# Altium PCB lab1_kochurin_usb_rs485.PcbDoc
Units mm, origin at the board's own origin, x right, y up, seen from the top; angles counter-clockwise.
Board outline 37 x 27 mm, 4 copper layers (Top Layer, Signal Layer 1, Signal Layer 2, Bottom Layer), stack 1.522 mm thick; 19 components, 17 nets, 95 pads, 546 vias.
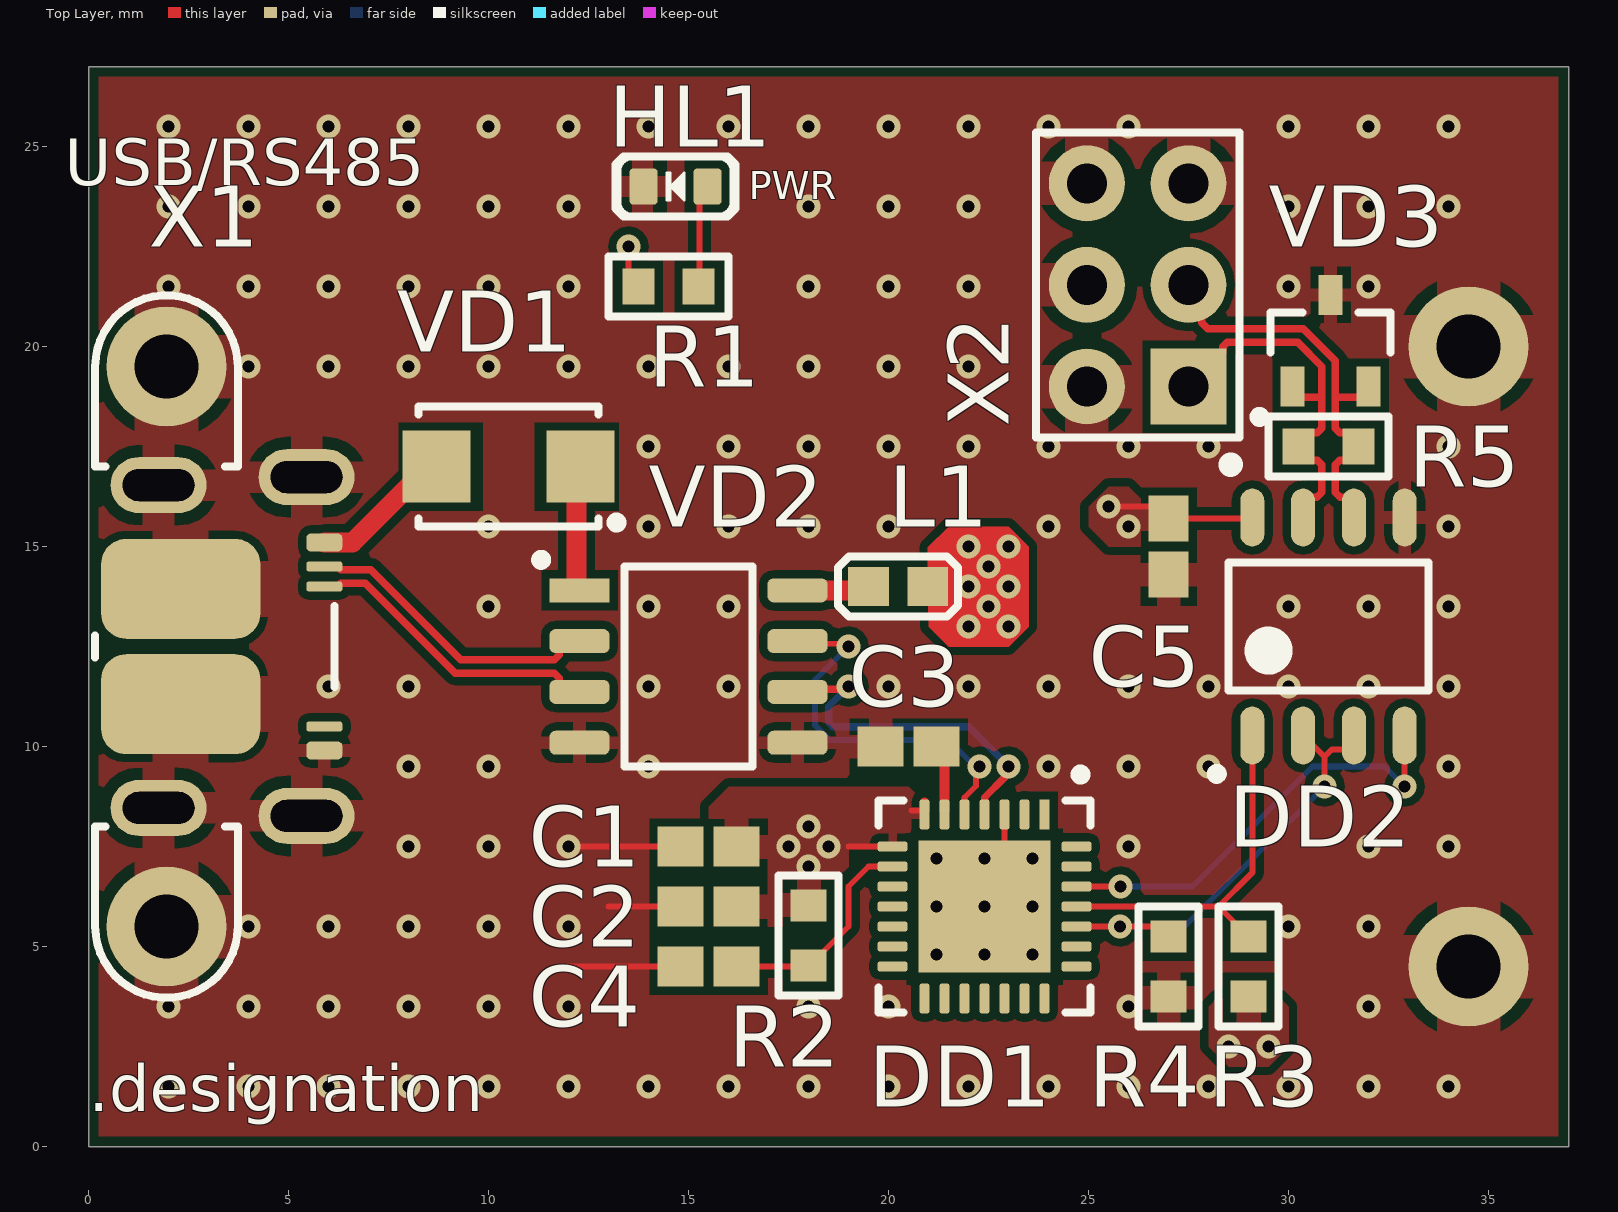
[diagram p0: Top Layer view]
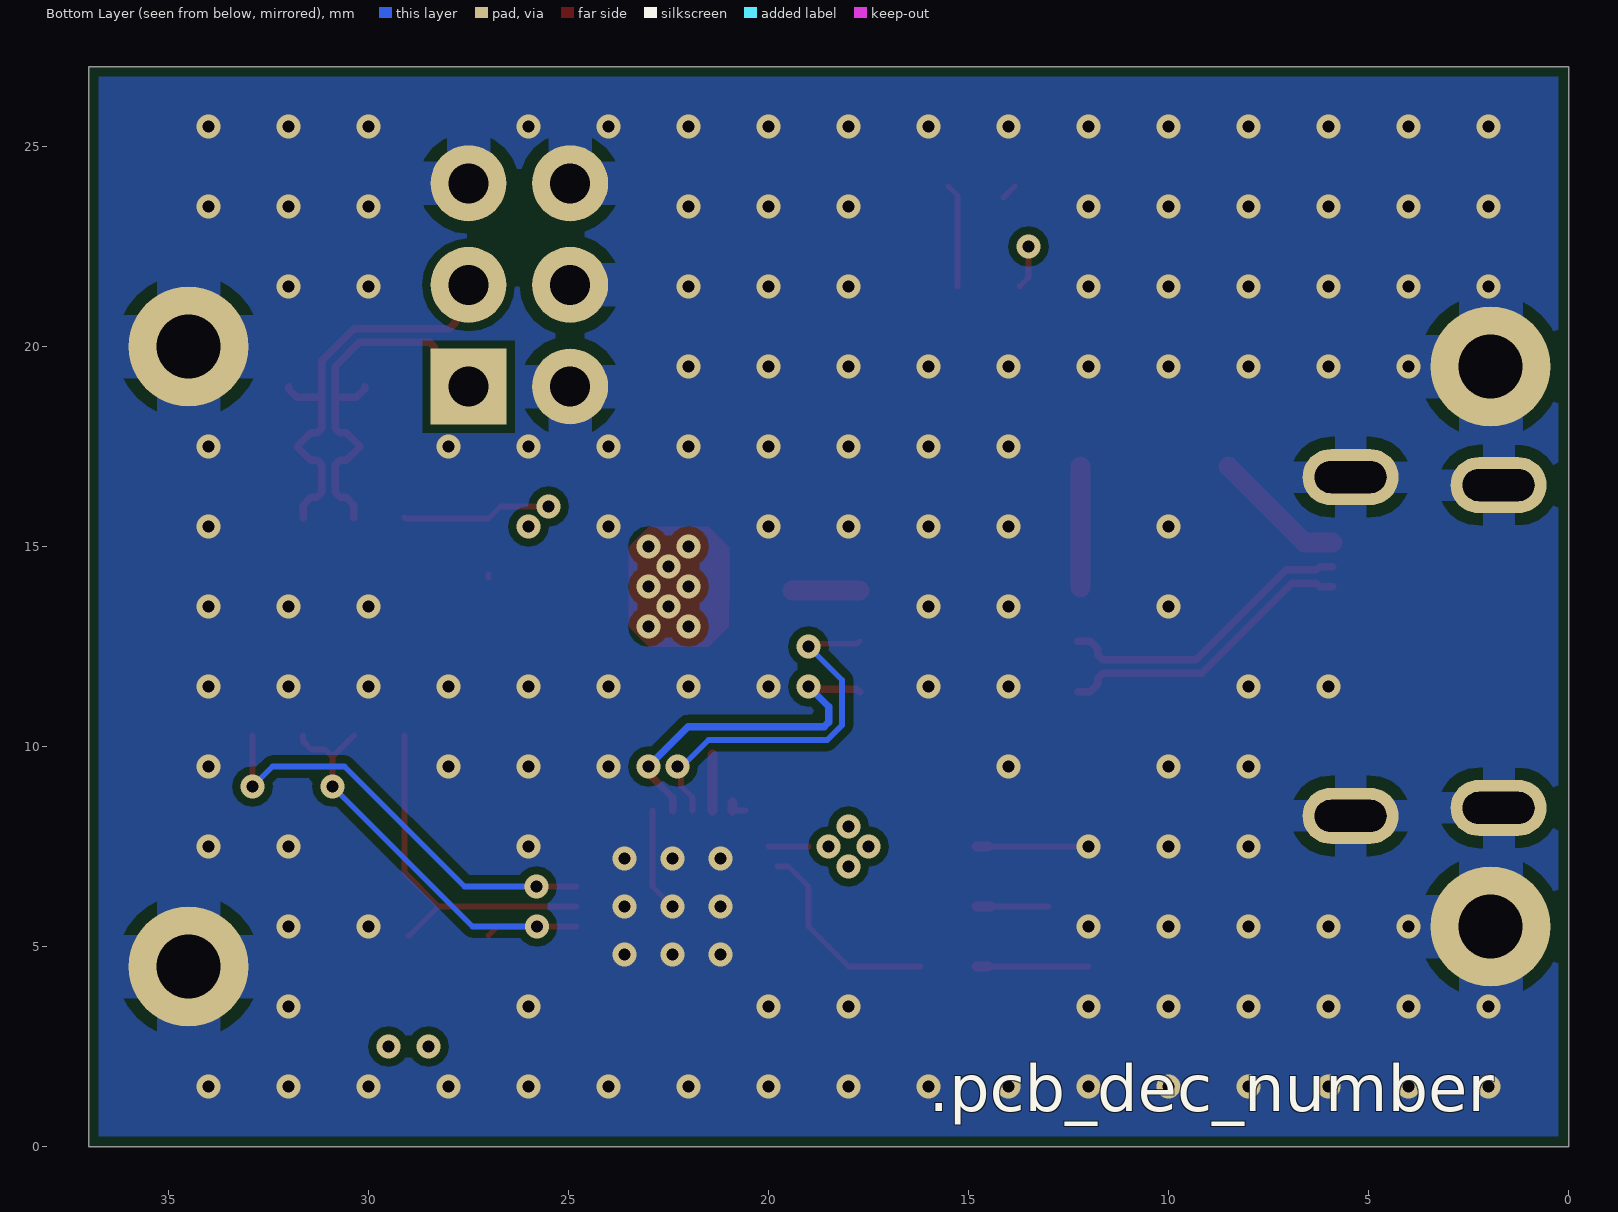
[diagram p1: Bottom Layer view, seen from below]
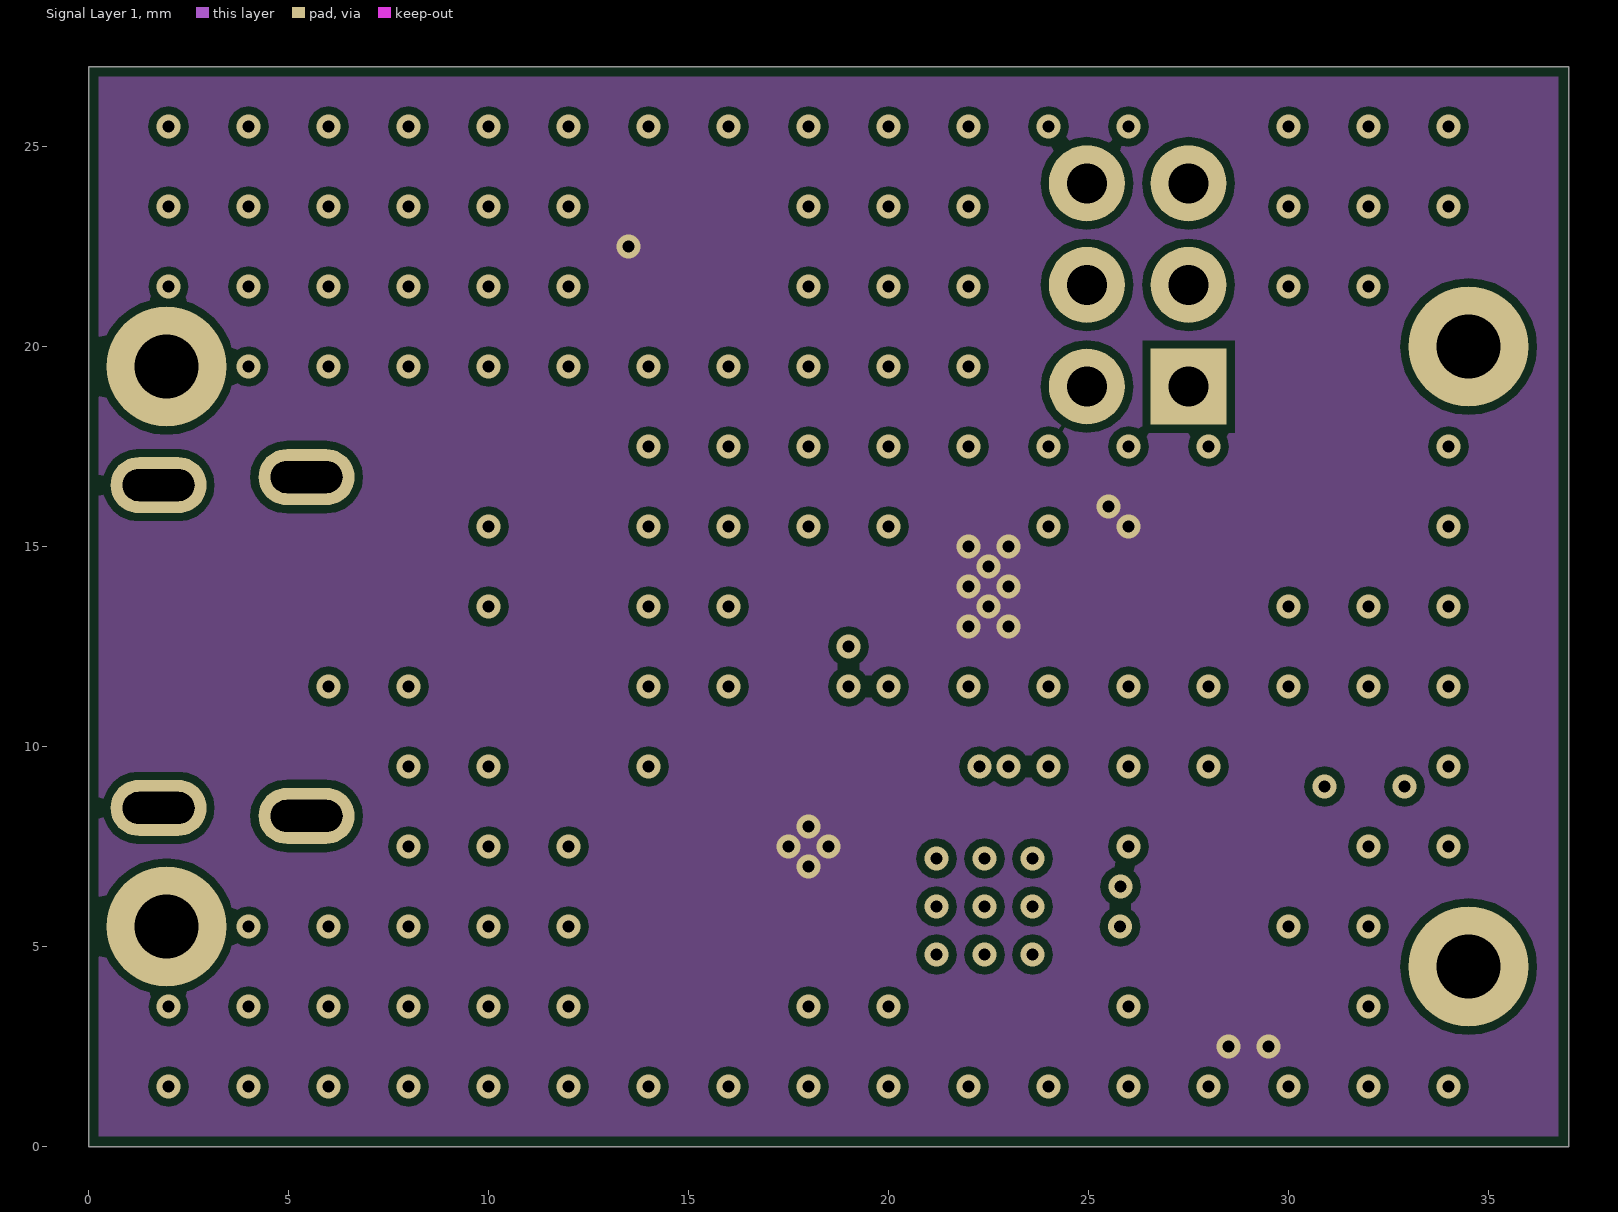
[diagram p2: Signal Layer 1]
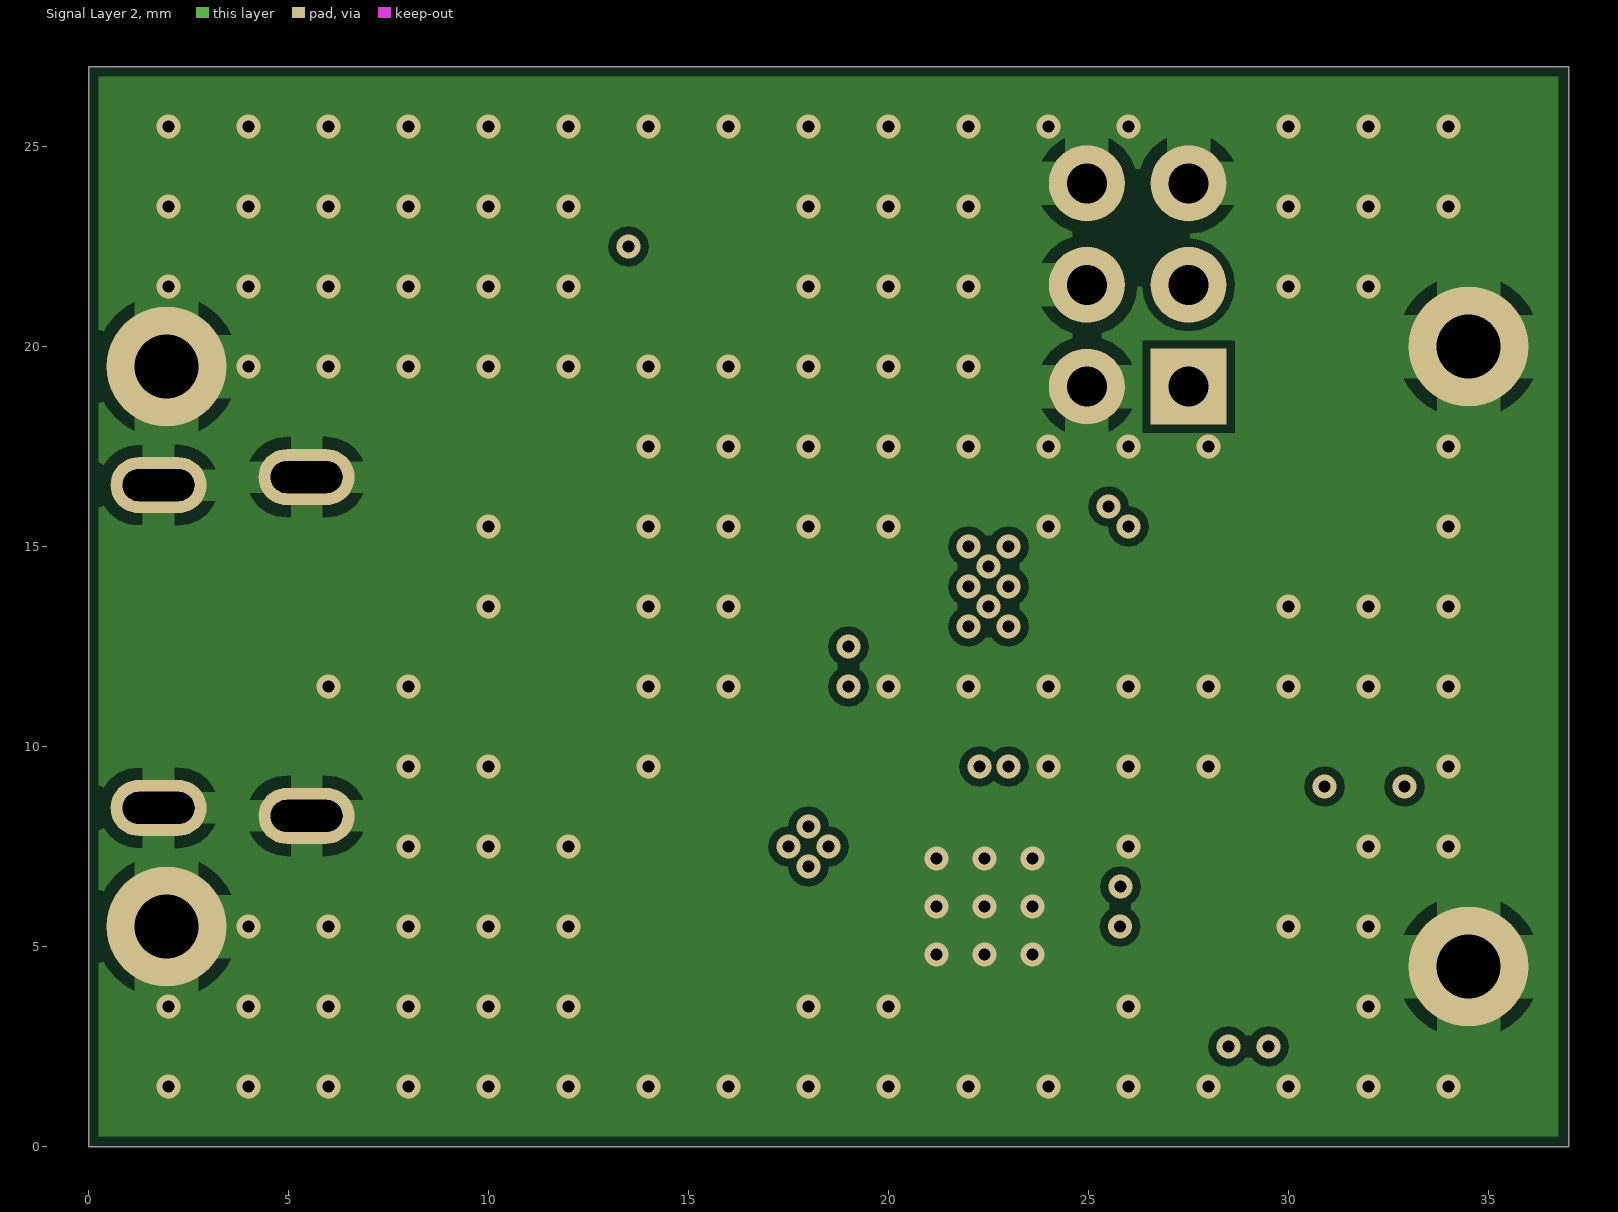
[diagram p3: Signal Layer 2]

## Layer stack, top to bottom
Top Solder: solder mask 0.0102, Solder Resist, Dk 3.5
Top Layer: signal copper 0.018
Prepreg 1: prepreg 0.125, FR4 HiTg170, Dk 5.07
Signal Layer 1: signal copper 0.018
Core 1: core 1.2, FR4, Dk 4.6
Signal Layer 2: signal copper 0.018
Prepreg 2: prepreg 0.125, FR4 HiTg170, Dk 5.07
Bottom Layer: signal copper 0.018
Bottom Solder: solder mask 0.0102, Solder Resist, Dk 3.5

## Board outline
0,0 0,27 37,27 37,0

## Design rules (kind name [scope] priority, off if disabled: settings)
AcuteAngle min_acute_angle [OnCopper] p1: minimum=3.50000000000000E+0001 checktracksonly=FALSE // Минимальный угол между примитивами топологии
BoardOutlineClearance board_outline_clearance_std [NOT (OnLayer('Bottom Overlay') OR OnLayer('Top Overlay'))] p1: gap=0.25 ignorepadtopadclearanceinfootprint=FALSE except(0: Arc-SplitContinuation Track-SplitContinuation SMDPad-SplitContinuation THPad-SplitContinuation Via-SplitContinuation Fill-SplitContinuation Poly-SplitContinuation Region-SplitContinuation Text-SplitContinuation) // Отступ элементов топологии от края фрезеруемой печатной платы
Clearance clearance_outer_18um_std [OnTopLayer OR OnBottomLayer] p1: gap=0.125 ignorepadtopadclearanceinfootprint=TRUE except(0.2: Arc-Fill Arc-Poly Track-Fill Track-Poly SMDPad-SMDPad SMDPad-Fill SMDPad-Poly THPad-Fill THPad-Poly Via-Fill Via-Poly Fill-Fill Fill-Poly Poly-Poly Poly-Region Poly-Text; 0.25: Arc-Hole Track-Hole SMDPad-Hole THPad-Hole Via-Hole Fill-Hole Poly-Hole Region-Hole Text-Hole) // Зазоры на внешних слоях
Clearance clearance_inner_18um_std [NOT (OnTopLayer Or OnBottomLayer)] p2: gap=0.125 ignorepadtopadclearanceinfootprint=FALSE except(0.2: Arc-Fill Arc-Poly Track-Fill Track-Poly SMDPad-SMDPad SMDPad-Fill SMDPad-Poly THPad-Fill THPad-Poly Via-Fill Via-Poly Fill-Fill Fill-Poly Poly-Poly Poly-Region Poly-Text; 0.25: Arc-Hole Track-Hole SMDPad-Hole THPad-Hole Via-Hole Fill-Hole Poly-Hole Region-Hole Text-Hole) // Зазоры на внутренних слоях
ComponentClearance [All] p1: gap=0 collisioncheckmode=3 verticalgap=0 showdistances=FALSE
DiffPairsRouting "Schematic Differential Pairs Routing_20" [InNet('D_IN_P')] p1: maxlimit=0.15 minlimit=0.15 mostfreqgap=0.15 toplayer_minwidth=0.188 toplayer_maxwidth=0.188 toplayer_prefwidth=0.188 midlayer1_minwidth=0.381 midlayer1_maxwidth=0.381 midlayer1_prefwidth=0.381 midlayer2_minwidth=0.381 midlayer2_maxwidth=0.381 midlayer2_prefwidth=0.381 bottomlayer_minwidth=0.188 bottomlayer_maxwidth=0.188 bottomlayer_prefwidth=0.188 impedanceprofiledriven=TRUE impedanceprofileid={1A75089D-CB2F-460C-A41B-D6A10C4A87C3} maxuncoupledlength=12.7
DiffPairsRouting "Schematic Differential Pairs Routing_19" [InNet('USB_D_IN_P')] p2: maxlimit=0.15 minlimit=0.15 mostfreqgap=0.15 toplayer_minwidth=0.188 toplayer_maxwidth=0.188 toplayer_prefwidth=0.188 midlayer1_minwidth=0.381 midlayer1_maxwidth=0.381 midlayer1_prefwidth=0.381 midlayer2_minwidth=0.381 midlayer2_maxwidth=0.381 midlayer2_prefwidth=0.381 bottomlayer_minwidth=0.188 bottomlayer_maxwidth=0.188 bottomlayer_prefwidth=0.188 impedanceprofiledriven=TRUE impedanceprofileid={1A75089D-CB2F-460C-A41B-D6A10C4A87C3} maxuncoupledlength=12.7
DiffPairsRouting "Schematic Differential Pairs Routing_18" [InNet('D_IN_N')] p3: maxlimit=0.15 minlimit=0.15 mostfreqgap=0.15 toplayer_minwidth=0.188 toplayer_maxwidth=0.188 toplayer_prefwidth=0.188 midlayer1_minwidth=0.381 midlayer1_maxwidth=0.381 midlayer1_prefwidth=0.381 midlayer2_minwidth=0.381 midlayer2_maxwidth=0.381 midlayer2_prefwidth=0.381 bottomlayer_minwidth=0.188 bottomlayer_maxwidth=0.188 bottomlayer_prefwidth=0.188 impedanceprofiledriven=TRUE impedanceprofileid={1A75089D-CB2F-460C-A41B-D6A10C4A87C3} maxuncoupledlength=12.7
DiffPairsRouting "Schematic Differential Pairs Routing_17" [InNet('RS485_N')] p4: maxlimit=0.15 minlimit=0.15 mostfreqgap=0.15 toplayer_minwidth=0.188 toplayer_maxwidth=0.188 toplayer_prefwidth=0.188 midlayer1_minwidth=0.381 midlayer1_maxwidth=0.381 midlayer1_prefwidth=0.381 midlayer2_minwidth=0.381 midlayer2_maxwidth=0.381 midlayer2_prefwidth=0.381 bottomlayer_minwidth=0.188 bottomlayer_maxwidth=0.188 bottomlayer_prefwidth=0.188 impedanceprofiledriven=TRUE impedanceprofileid={1A75089D-CB2F-460C-A41B-D6A10C4A87C3} maxuncoupledlength=12.7
DiffPairsRouting "Schematic Differential Pairs Routing_2" [InNet('USB_D_IN_N')] p5: maxlimit=0.15 minlimit=0.15 mostfreqgap=0.15 toplayer_minwidth=0.188 toplayer_maxwidth=0.188 toplayer_prefwidth=0.188 midlayer1_minwidth=0.381 midlayer1_maxwidth=0.381 midlayer1_prefwidth=0.381 midlayer2_minwidth=0.381 midlayer2_maxwidth=0.381 midlayer2_prefwidth=0.381 bottomlayer_minwidth=0.188 bottomlayer_maxwidth=0.188 bottomlayer_prefwidth=0.188 impedanceprofiledriven=TRUE impedanceprofileid={1A75089D-CB2F-460C-A41B-D6A10C4A87C3} maxuncoupledlength=12.7
DiffPairsRouting "Schematic Differential Pairs Routing_16" [InNet('USB_D_IN_P')] p6: maxlimit=0.15 minlimit=0.15 mostfreqgap=0.15 toplayer_minwidth=0.188 toplayer_maxwidth=0.188 toplayer_prefwidth=0.188 midlayer1_minwidth=0.381 midlayer1_maxwidth=0.381 midlayer1_prefwidth=0.381 midlayer2_minwidth=0.381 midlayer2_maxwidth=0.381 midlayer2_prefwidth=0.381 bottomlayer_minwidth=0.188 bottomlayer_maxwidth=0.188 bottomlayer_prefwidth=0.188 impedanceprofiledriven=TRUE impedanceprofileid={1A75089D-CB2F-460C-A41B-D6A10C4A87C3} maxuncoupledlength=12.7
DiffPairsRouting "Schematic Differential Pairs Routing_15" [InNet('RS485_N')] p7: maxlimit=0.15 minlimit=0.15 mostfreqgap=0.15 toplayer_minwidth=0.188 toplayer_maxwidth=0.188 toplayer_prefwidth=0.188 midlayer1_minwidth=0.381 midlayer1_maxwidth=0.381 midlayer1_prefwidth=0.381 midlayer2_minwidth=0.381 midlayer2_maxwidth=0.381 midlayer2_prefwidth=0.381 bottomlayer_minwidth=0.188 bottomlayer_maxwidth=0.188 bottomlayer_prefwidth=0.188 impedanceprofiledriven=TRUE impedanceprofileid={1A75089D-CB2F-460C-A41B-D6A10C4A87C3} maxuncoupledlength=12.7
DiffPairsRouting "Schematic Differential Pairs Routing_1" [InNet('D_IN_P')] p8: maxlimit=0.15 minlimit=0.15 mostfreqgap=0.15 toplayer_minwidth=0.188 toplayer_maxwidth=0.188 toplayer_prefwidth=0.188 midlayer1_minwidth=0.381 midlayer1_maxwidth=0.381 midlayer1_prefwidth=0.381 midlayer2_minwidth=0.381 midlayer2_maxwidth=0.381 midlayer2_prefwidth=0.381 bottomlayer_minwidth=0.188 bottomlayer_maxwidth=0.188 bottomlayer_prefwidth=0.188 impedanceprofiledriven=TRUE impedanceprofileid={1A75089D-CB2F-460C-A41B-D6A10C4A87C3} maxuncoupledlength=12.7
DiffPairsRouting "Schematic Differential Pairs Routing_14" [InNet('RS485_P')] p9: maxlimit=0.15 minlimit=0.15 mostfreqgap=0.15 toplayer_minwidth=0.188 toplayer_maxwidth=0.188 toplayer_prefwidth=0.188 midlayer1_minwidth=0.381 midlayer1_maxwidth=0.381 midlayer1_prefwidth=0.381 midlayer2_minwidth=0.381 midlayer2_maxwidth=0.381 midlayer2_prefwidth=0.381 bottomlayer_minwidth=0.188 bottomlayer_maxwidth=0.188 bottomlayer_prefwidth=0.188 impedanceprofiledriven=TRUE maxuncoupledlength=12.7
DiffPairsRouting "Schematic Differential Pairs Routing_13" [InNet('D_IN_P')] p10: maxlimit=0.15 minlimit=0.15 mostfreqgap=0.15 toplayer_minwidth=0.188 toplayer_maxwidth=0.188 toplayer_prefwidth=0.188 midlayer1_minwidth=0.381 midlayer1_maxwidth=0.381 midlayer1_prefwidth=0.381 midlayer2_minwidth=0.381 midlayer2_maxwidth=0.381 midlayer2_prefwidth=0.381 bottomlayer_minwidth=0.188 bottomlayer_maxwidth=0.188 bottomlayer_prefwidth=0.188 impedanceprofiledriven=TRUE maxuncoupledlength=12.7
DiffPairsRouting "Schematic Differential Pairs Routing_12" [InNet('RS485_N')] p11: maxlimit=0.15 minlimit=0.15 mostfreqgap=0.15 toplayer_minwidth=0.188 toplayer_maxwidth=0.188 toplayer_prefwidth=0.188 midlayer1_minwidth=0.381 midlayer1_maxwidth=0.381 midlayer1_prefwidth=0.381 midlayer2_minwidth=0.381 midlayer2_maxwidth=0.381 midlayer2_prefwidth=0.381 bottomlayer_minwidth=0.188 bottomlayer_maxwidth=0.188 bottomlayer_prefwidth=0.188 impedanceprofiledriven=TRUE maxuncoupledlength=12.7
DiffPairsRouting "Schematic Differential Pairs Routing" [InNet('USB_D_IN_P')] p12: maxlimit=0.15 minlimit=0.15 mostfreqgap=0.15 toplayer_minwidth=0.188 toplayer_maxwidth=0.188 toplayer_prefwidth=0.188 midlayer1_minwidth=0.381 midlayer1_maxwidth=0.381 midlayer1_prefwidth=0.381 midlayer2_minwidth=0.381 midlayer2_maxwidth=0.381 midlayer2_prefwidth=0.381 bottomlayer_minwidth=0.188 bottomlayer_maxwidth=0.188 bottomlayer_prefwidth=0.188 impedanceprofiledriven=TRUE maxuncoupledlength=12.7
DiffPairsRouting "Schematic Differential Pairs Routing_11" [InNet('USB_D_IN_N')] p13: maxlimit=0.15 minlimit=0.15 mostfreqgap=0.15 toplayer_minwidth=0.188 toplayer_maxwidth=0.188 toplayer_prefwidth=0.188 midlayer1_minwidth=0.381 midlayer1_maxwidth=0.381 midlayer1_prefwidth=0.381 midlayer2_minwidth=0.381 midlayer2_maxwidth=0.381 midlayer2_prefwidth=0.381 bottomlayer_minwidth=0.188 bottomlayer_maxwidth=0.188 bottomlayer_prefwidth=0.188 impedanceprofiledriven=TRUE maxuncoupledlength=12.7
DiffPairsRouting "Schematic Differential Pairs Routing_10" [InNet('D_IN_P')] p14: maxlimit=0.15 minlimit=0.15 mostfreqgap=0.15 toplayer_minwidth=0.188 toplayer_maxwidth=0.188 toplayer_prefwidth=0.188 midlayer1_minwidth=0.381 midlayer1_maxwidth=0.381 midlayer1_prefwidth=0.381 midlayer2_minwidth=0.381 midlayer2_maxwidth=0.381 midlayer2_prefwidth=0.381 bottomlayer_minwidth=0.188 bottomlayer_maxwidth=0.188 bottomlayer_prefwidth=0.188 impedanceprofiledriven=TRUE maxuncoupledlength=12.7
DiffPairsRouting "Schematic Differential Pairs Routing_9" [InNet('USB_D_IN_P')] p15: maxlimit=0.15 minlimit=0.15 mostfreqgap=0.15 toplayer_minwidth=0.188 toplayer_maxwidth=0.188 toplayer_prefwidth=0.188 midlayer1_minwidth=0.381 midlayer1_maxwidth=0.381 midlayer1_prefwidth=0.381 midlayer2_minwidth=0.381 midlayer2_maxwidth=0.381 midlayer2_prefwidth=0.381 bottomlayer_minwidth=0.188 bottomlayer_maxwidth=0.188 bottomlayer_prefwidth=0.188 impedanceprofiledriven=TRUE maxuncoupledlength=12.7
DiffPairsRouting "Schematic Differential Pairs Routing_5" [InNet('RS485_N')] p16: maxlimit=0.15 minlimit=0.15 mostfreqgap=0.15 toplayer_minwidth=0.188 toplayer_maxwidth=0.188 toplayer_prefwidth=0.188 midlayer1_minwidth=0.381 midlayer1_maxwidth=0.381 midlayer1_prefwidth=0.381 midlayer2_minwidth=0.381 midlayer2_maxwidth=0.381 midlayer2_prefwidth=0.381 bottomlayer_minwidth=0.188 bottomlayer_maxwidth=0.188 bottomlayer_prefwidth=0.188 impedanceprofiledriven=TRUE maxuncoupledlength=12.7
DiffPairsRouting "Schematic Differential Pairs Routing_8" [InNet('RS485_P')] p17: maxlimit=0.15 minlimit=0.15 mostfreqgap=0.15 toplayer_minwidth=0.188 toplayer_maxwidth=0.188 toplayer_prefwidth=0.188 midlayer1_minwidth=0.381 midlayer1_maxwidth=0.381 midlayer1_prefwidth=0.381 midlayer2_minwidth=0.381 midlayer2_maxwidth=0.381 midlayer2_prefwidth=0.381 bottomlayer_minwidth=0.188 bottomlayer_maxwidth=0.188 bottomlayer_prefwidth=0.188 impedanceprofiledriven=TRUE maxuncoupledlength=12.7
DiffPairsRouting "Schematic Differential Pairs Routing_7" [InNet('RS485_N')] p18: maxlimit=0.15 minlimit=0.15 mostfreqgap=0.15 toplayer_minwidth=0.188 toplayer_maxwidth=0.188 toplayer_prefwidth=0.188 midlayer1_minwidth=0.381 midlayer1_maxwidth=0.381 midlayer1_prefwidth=0.381 midlayer2_minwidth=0.381 midlayer2_maxwidth=0.381 midlayer2_prefwidth=0.381 bottomlayer_minwidth=0.188 bottomlayer_maxwidth=0.188 bottomlayer_prefwidth=0.188 impedanceprofiledriven=TRUE maxuncoupledlength=12.7
DiffPairsRouting "Schematic Differential Pairs Routing_6" [InNet('D_IN_P')] p19: maxlimit=0.15 minlimit=0.15 mostfreqgap=0.15 toplayer_minwidth=0.188 toplayer_maxwidth=0.188 toplayer_prefwidth=0.188 midlayer1_minwidth=0.381 midlayer1_maxwidth=0.381 midlayer1_prefwidth=0.381 midlayer2_minwidth=0.381 midlayer2_maxwidth=0.381 midlayer2_prefwidth=0.381 bottomlayer_minwidth=0.188 bottomlayer_maxwidth=0.188 bottomlayer_prefwidth=0.188 impedanceprofiledriven=TRUE maxuncoupledlength=12.7
DiffPairsRouting "Schematic Differential Pairs Routing_4" [InNet('USB_D_IN_N')] p20: maxlimit=0.15 minlimit=0.15 mostfreqgap=0.15 toplayer_minwidth=0.188 toplayer_maxwidth=0.188 toplayer_prefwidth=0.188 midlayer1_minwidth=0.381 midlayer1_maxwidth=0.381 midlayer1_prefwidth=0.381 midlayer2_minwidth=0.381 midlayer2_maxwidth=0.381 midlayer2_prefwidth=0.381 bottomlayer_minwidth=0.188 bottomlayer_maxwidth=0.188 bottomlayer_prefwidth=0.188 impedanceprofiledriven=TRUE maxuncoupledlength=12.7
DiffPairsRouting "Schematic Differential Pairs Routing_3" [InNet('USB_D_IN_P')] p21: maxlimit=0.15 minlimit=0.15 mostfreqgap=0.15 toplayer_minwidth=0.188 toplayer_maxwidth=0.188 toplayer_prefwidth=0.188 midlayer1_minwidth=0.381 midlayer1_maxwidth=0.381 midlayer1_prefwidth=0.381 midlayer2_minwidth=0.381 midlayer2_maxwidth=0.381 midlayer2_prefwidth=0.381 bottomlayer_minwidth=0.188 bottomlayer_maxwidth=0.188 bottomlayer_prefwidth=0.188 impedanceprofiledriven=TRUE maxuncoupledlength=12.7
DiffPairsRouting diff_pairs_routing [All] p22: maxlimit=0.254 minlimit=0.127 mostfreqgap=0.254 toplayer_maxgap=0.127 toplayer_prefgap=0.127 toplayer_minwidth=0.143 toplayer_maxwidth=0.143 toplayer_prefwidth=0.143 midlayer1_minwidth=0.381 midlayer1_maxwidth=0.381 midlayer1_prefwidth=0.381 midlayer2_minwidth=0.381 midlayer2_maxwidth=0.381 midlayer2_prefwidth=0.381 bottomlayer_maxgap=0.127 bottomlayer_prefgap=0.127 bottomlayer_minwidth=0.143 bottomlayer_maxwidth=0.143 bottomlayer_prefwidth=0.143 impedanceprofiledriven=TRUE maxuncoupledlength=12.7 // Правила трассировки дифференциальных пар
HoleSize min_hole_size_std [IsPad] p1: absolutevalues=TRUE maxlimit=5.9 minlimit=0.6 maxpercent=80.000 minpercent=20.000 // Диаметр межслойного переходного отверстия
HoleSize min_hole_size_via_std [IsVia] p2: absolutevalues=TRUE maxlimit=5.9 minlimit=0.3 maxpercent=80.000 minpercent=20.000 // Минимальный диаметр монтажного отверстия
HoleToHoleClearance hole_to_hole_clearance_std [All] p1: gap=0.2 allowstackedmicrovias=FALSE // Минимальное расстояние между краями двух отверстий
MinimumAnnularRing min_via_ar_std [All] p1: minimumring=0.15 // Поясок площадки переходного отверстия (Annular ring VIA)
MinimumAnnularRing min_pad_ar_std [All] p2: minimumring=0.2 // Поясок монтажной контактной площадки (Annular ring PAD)
MinimumSolderMaskSliver min_solder_mask_bridge_std [All] p1: minsoldermaskwidth=0.15 // Мнимальная ширина масочного мостика
PlaneClearance plane_clearance_18um_std [All] p1: clearance=0.2 // Отступ полигона (для слоя plane) от элементов топологии
PlaneConnect [All] p1: planeconnectstyle=Relief reliefexpansion=0.5 reliefentries=4 reliefconductorwidth=0.2 reliefairgap=0.2
PolygonConnect poly_connect_to_pad<=0.3 [(AsMM(PadXSize_AllLayers)<=0.301) or (AsMM(PadYSize_AllLayers)<=0.301)] p1: thpad.connectstyle=Relief thpad.reliefconductorwidth=0.2 thpad.reliefentries=4 thpad.polygonreliefangle="90 Angle" thpad.airgapwidth=0.2 smdpad.connectstyle=Relief smdpad.reliefconductorwidth=0.2 smdpad.reliefentries=4 smdpad.polygonreliefangle="90 Angle" smdpad.airgapwidth=0.2 via.connectstyle=Direct via.reliefconductorwidth=0.254 via.reliefentries=4 via.polygonreliefangle="90 Angle" via.airgapwidth=0.254 // Правила подключения полигонов для падов от 0,3мм и меньше
PolygonConnect poly_connect_to_pad<=0.4 [(AsMM(PadXSize_AllLayers)<=0.401) or (AsMM(PadYSize_AllLayers)<=0.401)] p2: thpad.connectstyle=Relief thpad.reliefconductorwidth=0.26 thpad.reliefentries=4 thpad.polygonreliefangle="90 Angle" thpad.airgapwidth=0.2 smdpad.connectstyle=Relief smdpad.reliefconductorwidth=0.26 smdpad.reliefentries=4 smdpad.polygonreliefangle="90 Angle" smdpad.airgapwidth=0.2 via.connectstyle=Direct via.reliefconductorwidth=0.254 via.reliefentries=4 via.polygonreliefangle="90 Angle" via.airgapwidth=0.254 // Правила подключения полигонов для падов от 0,4 и меньше
PolygonConnect poly_connect_to_pad<=0.6 [(AsMM(PadXSize_AllLayers)<=0.601) or (AsMM(PadYSize_AllLayers)<=0.601)] p3: thpad.connectstyle=Relief thpad.reliefconductorwidth=0.33 thpad.reliefentries=4 thpad.polygonreliefangle="90 Angle" thpad.airgapwidth=0.2 smdpad.connectstyle=Relief smdpad.reliefconductorwidth=0.33 smdpad.reliefentries=4 smdpad.polygonreliefangle="90 Angle" smdpad.airgapwidth=0.2 via.connectstyle=Direct via.reliefconductorwidth=0.254 via.reliefentries=4 via.polygonreliefangle="90 Angle" via.airgapwidth=0.254 // Правила подключения полигонов для падов от 0,6мм и меньше
PolygonConnect poly_connect_to_pad<=0.7 [(AsMM(PadXSize_AllLayers)<=0.701) or (AsMM(PadYSize_AllLayers)<=0.701)] p4: thpad.connectstyle=Relief thpad.reliefconductorwidth=0.46 thpad.reliefentries=4 thpad.polygonreliefangle="90 Angle" thpad.airgapwidth=0.2 smdpad.connectstyle=Relief smdpad.reliefconductorwidth=0.46 smdpad.reliefentries=4 smdpad.polygonreliefangle="90 Angle" smdpad.airgapwidth=0.2 via.connectstyle=Direct via.reliefconductorwidth=0.254 via.reliefentries=4 via.polygonreliefangle="90 Angle" via.airgapwidth=0.254 // Правила подключения полигонов для падов от 0,7мм и меньше
PolygonConnect poly_connect_to_pad<=0.8 [(AsMM(PadXSize_AllLayers)<=0.8)or(AsMM(PadYSize_AllLayers)<=0.8)] p5: thpad.connectstyle=Relief thpad.reliefconductorwidth=0.53 thpad.reliefentries=4 thpad.polygonreliefangle="90 Angle" thpad.airgapwidth=0.3 smdpad.connectstyle=Relief smdpad.reliefconductorwidth=0.53 smdpad.reliefentries=4 smdpad.polygonreliefangle="90 Angle" smdpad.airgapwidth=0.2 via.connectstyle=Direct via.reliefconductorwidth=0.254 via.reliefentries=4 via.polygonreliefangle="90 Angle" via.airgapwidth=0.254 // Правила подключения полигонов для падов от 0,8мм и меньше
PolygonConnect poly_connect_to_pad<=1 [(AsMM(PadXSize_AllLayers)<=1.01)or(AsMM(PadYSize_AllLayers)<=1.01)] p6: thpad.connectstyle=Relief thpad.reliefconductorwidth=0.6 thpad.reliefentries=4 thpad.polygonreliefangle="90 Angle" thpad.airgapwidth=0.3 smdpad.connectstyle=Relief smdpad.reliefconductorwidth=0.6 smdpad.reliefentries=4 smdpad.polygonreliefangle="90 Angle" smdpad.airgapwidth=0.2 via.connectstyle=Direct via.reliefconductorwidth=0.254 via.reliefentries=4 via.polygonreliefangle="90 Angle" via.airgapwidth=0.254 // Правила подключения полигонов для падов от 1мм и меньше
PolygonConnect poly_connect_to_pad<=1.3 [(AsMM(PadXSize_AllLayers)<=1.31)or(AsMM(PadYSize_AllLayers)<=1.31)] p7: thpad.connectstyle=Relief thpad.reliefconductorwidth=0.66 thpad.reliefentries=4 thpad.polygonreliefangle="90 Angle" thpad.airgapwidth=0.3 smdpad.connectstyle=Relief smdpad.reliefconductorwidth=0.86 smdpad.reliefentries=4 smdpad.polygonreliefangle="90 Angle" smdpad.airgapwidth=0.2 via.connectstyle=Direct via.reliefconductorwidth=0.254 via.reliefentries=4 via.polygonreliefangle="90 Angle" via.airgapwidth=0.254 // Правила подключения полигонов для падов от 1,3мм и меньше
PolygonConnect poly_connect_to_pad<=1.6 [(AsMM(PadXSize_AllLayers)<=1.61)or(AsMM(PadYSize_AllLayers)<=1.61)] p8: thpad.connectstyle=Relief thpad.reliefconductorwidth=0.8 thpad.reliefentries=4 thpad.polygonreliefangle="90 Angle" thpad.airgapwidth=0.3 smdpad.connectstyle=Relief smdpad.reliefconductorwidth=1 smdpad.reliefentries=4 smdpad.polygonreliefangle="90 Angle" smdpad.airgapwidth=0.2 via.connectstyle=Direct via.reliefconductorwidth=0.254 via.reliefentries=4 via.polygonreliefangle="90 Angle" via.airgapwidth=0.254 // Правила подключения полигонов для падов от 1,6мм и меньше
PolygonConnect poly_connect_to_pad<=1.8 [(AsMM(PadXSize_AllLayers)<=1.8)or(AsMM(PadYSize_AllLayers)<=1.8)] p9: thpad.connectstyle=Relief thpad.reliefconductorwidth=1 thpad.reliefentries=4 thpad.polygonreliefangle="90 Angle" thpad.airgapwidth=0.3 smdpad.connectstyle=Relief smdpad.reliefconductorwidth=1.2 smdpad.reliefentries=4 smdpad.polygonreliefangle="90 Angle" smdpad.airgapwidth=0.2 via.connectstyle=Direct via.reliefconductorwidth=0.254 via.reliefentries=4 via.polygonreliefangle="90 Angle" via.airgapwidth=0.254 // Правила подключения полигонов для падов от 1,8мм и меньше
PolygonConnect poly_connect_to_pad<=2 [(AsMM(PadXSize_AllLayers)<=2.01)or(AsMM(PadYSize_AllLayers)<=2.01)] p10: thpad.connectstyle=Relief thpad.reliefconductorwidth=1.1 thpad.reliefentries=4 thpad.polygonreliefangle="90 Angle" thpad.airgapwidth=0.3 smdpad.connectstyle=Relief smdpad.reliefconductorwidth=1.4 smdpad.reliefentries=4 smdpad.polygonreliefangle="90 Angle" smdpad.airgapwidth=0.2 via.connectstyle=Direct via.reliefconductorwidth=0.254 via.reliefentries=4 via.polygonreliefangle="90 Angle" via.airgapwidth=0.254 // Правила подключения полигонов для падов от 2мм и меньше
PolygonConnect poly_connect_to_pad<=2.3 [(AsMM(PadXSize_AllLayers)<=2.31)or(AsMM(PadYSize_AllLayers)<=2.31)] p11: thpad.connectstyle=Relief thpad.reliefconductorwidth=1.2 thpad.reliefentries=4 thpad.polygonreliefangle="90 Angle" thpad.airgapwidth=0.3 smdpad.connectstyle=Relief smdpad.reliefconductorwidth=1.4 smdpad.reliefentries=4 smdpad.polygonreliefangle="90 Angle" smdpad.airgapwidth=0.2 via.connectstyle=Direct via.reliefconductorwidth=0.254 via.reliefentries=4 via.polygonreliefangle="90 Angle" via.airgapwidth=0.254 // Правила подключения полигонов для падов от 2,3мм и меньше
PolygonConnect poly_connect_to_pad<=2.5 [(AsMM(PadXSize_AllLayers)<=2.51)or(AsMM(PadYSize_AllLayers)<=2.51)] p12: thpad.connectstyle=Relief thpad.reliefconductorwidth=1.2 thpad.reliefentries=4 thpad.polygonreliefangle="90 Angle" thpad.airgapwidth=0.3 smdpad.connectstyle=Relief smdpad.reliefconductorwidth=1.4 smdpad.reliefentries=4 smdpad.polygonreliefangle="90 Angle" smdpad.airgapwidth=0.2 via.connectstyle=Direct via.reliefconductorwidth=0.254 via.reliefentries=4 via.polygonreliefangle="90 Angle" via.airgapwidth=0.254 // Правила подключения полигонов для падов от 2,5мм и меньше
PolygonConnect poly_connect_to_pad<=2.7 [(AsMM(PadXSize_AllLayers)<=2.71)or(AsMM(PadYSize_AllLayers)<=2.71)] p13: thpad.connectstyle=Relief thpad.reliefconductorwidth=1.4 thpad.reliefentries=4 thpad.polygonreliefangle="90 Angle" thpad.airgapwidth=0.3 smdpad.connectstyle=Relief smdpad.reliefconductorwidth=1.6 smdpad.reliefentries=4 smdpad.polygonreliefangle="90 Angle" smdpad.airgapwidth=0.2 via.connectstyle=Direct via.reliefconductorwidth=0.254 via.reliefentries=4 via.polygonreliefangle="90 Angle" via.airgapwidth=0.254 // Правила подключения полигонов для падов от 2,7мм и меньше
PolygonConnect poly_connect_to_pad<=3 [(AsMM(PadXSize_AllLayers)<=3.01)or(AsMM(PadYSize_AllLayers)<=3.01)] p14: thpad.connectstyle=Relief thpad.reliefconductorwidth=1.6 thpad.reliefentries=4 thpad.polygonreliefangle="90 Angle" thpad.airgapwidth=0.3 smdpad.connectstyle=Relief smdpad.reliefconductorwidth=1.8 smdpad.reliefentries=4 smdpad.polygonreliefangle="90 Angle" smdpad.airgapwidth=0.2 via.connectstyle=Direct via.reliefconductorwidth=0.254 via.reliefentries=4 via.polygonreliefangle="90 Angle" via.airgapwidth=0.254 // Правила подключения полигонов для падов от 3мм и меньше
PolygonConnect poly_connect_to_pad<=7 [(AsMM(PadXSize_AllLayers)<7.01)or(AsMM(PadYSize_AllLayers)<=7.01)] p15: thpad.connectstyle=Relief thpad.reliefconductorwidth=2 thpad.reliefentries=4 thpad.polygonreliefangle="90 Angle" thpad.airgapwidth=0.4 smdpad.connectstyle=Relief smdpad.reliefconductorwidth=2 smdpad.reliefentries=4 smdpad.polygonreliefangle="90 Angle" smdpad.airgapwidth=0.3 via.connectstyle=Direct via.reliefconductorwidth=0.254 via.reliefentries=4 via.polygonreliefangle="90 Angle" via.airgapwidth=0.254 // Правила подключения полигонов для падов от 7мм и меньше
PolygonConnect poly_connect_to_pad [All] p16: thpad.connectstyle=Relief thpad.reliefconductorwidth=0.25 thpad.reliefentries=4 thpad.polygonreliefangle="90 Angle" thpad.airgapwidth=0.2 smdpad.connectstyle=Relief smdpad.reliefconductorwidth=0.25 smdpad.reliefentries=4 smdpad.polygonreliefangle="90 Angle" smdpad.airgapwidth=0.2 via.connectstyle=Direct via.reliefconductorwidth=0.25 via.reliefentries=4 via.polygonreliefangle="90 Angle" via.airgapwidth=0.2 // Правила подключения полигонов общие
RoutingCorners [All] p1 off: cornerstyle=45-Degree minsetback=2.5 maxsetback=2.5
RoutingVias [All] p1: holewidth=0.3 width=0.6 viastyle="Through Hole" minholewidth=0.3 minwidth=0.6 maxholewidth=5.9 maxwidth=6.4
SilkToSilkClearance silk_to_silk_clearance_std [All] p1 off: silktosilkclearance=0.15 // Отступ текста шелкографии от других примитивов шелкографии
SilkToSolderMaskClearance silk_to_solder_mask_clearance_std [IsPad] p1 off: minsilkscreentomaskgap=0.15 clearancetoexposedcopper=FALSE // Минимальное расстояние между элементами шелкографии и вскрытой медью
SolderMaskExpansion solder_mask_expansion_std [All] p1: expansion=0.05 // Припуск паяльной масски
UnRoutedNet [All] p1: checkbadconnections=TRUE
Width width_18um_std [All] p1: maxlimit=10 minlimit=0.125 preferedwidth=0.15 checkconnectedcopper=TRUE // Ширина проводников (общая)
19 further rules are at their usual default settings.

## Classes and differential pairs
differential pair class USB_SIGNALS: D_IN RS485 USB_D_IN
differential pair USB_D_IN: +USB_D_IN_P -USB_D_IN_N
differential pair RS485: +RS485_P -RS485_N
differential pair D_IN: +D_IN_P -D_IN_N

## Components (designator, comment, footprint, x,y, rotation, side; value= is the part's Value field where it differs from the comment)
C1 "1 мк" C0603 15.5,7.5 r0 top
C2 "0,1 мк" C0603 15.5,6 r180 top
C3 "0,1 мк" C0603 20.5,10 r180 top
C4 "0,1 мк" C0603 15.5,4.5 r180 top
C5 "0,1 мк" C0603 27,15 r270 top
DD1 "CP2102-GM" QFN-28-500X500X90 22.4,6 r270 top
DD2 "SN65HVD1781D" SOIC-8#1 31,13 r90 top
HL1 "TLMY1000-GS08" HL0603 14.675,24 r0 top
L1 "BLM18PG221SN1D" BLM-2-0603 20.24,14 r0 top
R1 "220" R0603 14.5,21.5 r180 top
R2 "4,7 к" R0603 18,5.275 r90 top
R3 "10 к" R0603 29,4.5 r270 top
R4 "10 к" R0603 27,4.5 r90 top
R5 "120" R0603 31,17.5 r180 top
VD1 "SL13-E3/5AT" DO-214AC 10.5,17 r180 top
VD2 "USB6B1" SOIC-8#2 15,12 r0 top
VD3 "SM712-02HTG" SOT23-3 31.05,20.145 r90 top
X1 "2108877-1" 2108877-1 2.2,12.5 r90 top
X2 "DS1021-2x3SF11-B" DS1021-2X3SF11-B 26.23,21.54 r90 top

## Footprints (in the part's own frame and the unit in brackets; to place one, negate y for a bottom-side part, rotate by r counter-clockwise, add the part's x,y. Pads: shape width x height; smd on the part's side, far side on the other; paste and mask are expansions set on the pad)
2108877-1 [mm]
  rrect50% 0.45x0.9 smd: 1(2.6,-3.696) 5(-2.6,-3.696)
  rrect50% 0.25x0.9 smd: 2(2,-3.696) 3(1.5,-3.696) 4(-2,-3.696)
  round 3 hole 1.6: TP1(-7,0.25) TP1(7,0.25)
  oval 1.4x2.4 hole 0.8 slot 1.8 at 90 deg mask+0.102: TP1(-4.235,-3.25) TP1(-4.035,0.45) TP1(4.035,0.45) TP1(4.235,-3.25)
  rrect50% 2.5x3.98 smd: TP1(-1.441,-0.104) TP1(1.441,-0.104)
  silkscreen extent -8.78,-3.95 8.78,2.03, body extent -8.9,-3.95 8.9,3.95, height 3.39
BLM-2-0603 [mm] "Chip Inductor, 2-Leads, Body 1,60x0,80mm, IPC Medium Density"
  rect 1.02x0.98 smd: 1(-0.74,0) 2(0.74,0)
  silkscreen extent -1.5,-0.75 1.5,0.75, body extent -0.8,-0.37 0.8,0.38, height 0.8
C0603 [mm] "Chip Capacitor, 2-Leads, Body 1,60x0,80mm, IPC Medium Density"
  rect 1.15x1 smd: 1(-0.7,0) 2(0.7,0)
  body extent -0.8,-0.4 0.8,0.4, height 0.8
DO-214AC [mm] "Molded Diode, 2-Leads, Body 4,25x2,67mm, IPC Medium Density"
  rect 1.7x1.8 smd: 1(-1.8,0) 2(1.8,0)
  silkscreen extent -2.83,-1.5 2.25,1.52, body extent -2.55,-1.3 2.55,1.3, height 2.26
DS1021-2X3SF11-B [mm]
  rect 1.9x1.9 hole 1: 1(-2.54,-1.27)
  round 1.9 hole 1: 2(0,-1.27) 4(-2.54,1.27)
  round 1.9 hole 1 mask+0.102: 3(2.54,-1.27) 5(0,1.27) 6(2.54,1.27)
  silkscreen extent -4.5,-2.55 3.81,2.54, body extent -3.81,-2.54 3.81,2.54, height 8.59
HL0603 [mm] "Chip Resistor, 2-Leads, Body 1,60x0,80mm, IPC Medium Density"
  rrect25% 0.7x0.9 smd: 1(-0.8,0) 2(0.8,0)
  silkscreen extent -1.5,-0.75 1.5,0.75, body extent -0.81,-0.4 0.81,0.4, height 0.64
QFN-28-500X500X90 [mm] "QFN, 28-Leads, Body 5,00x5,00mm, Pitch 0,50mm, Thermal Pad 3,20x3,20mm, IPC Medium Density"
  rect 3.3x3.3 smd: 0(0,0)
  rect 0.75x0.25 smd: 1(-2.3,1.5)
  rrect50% 0.75x0.25 smd: 2(-2.3,1) 3(-2.3,0.5) 4(-2.3,0) 5(-2.3,-0.5) 6(-2.3,-1) 7(-2.3,-1.5) 15(2.3,-1.5) 16(2.3,-1) 17(2.3,-0.5) 18(2.3,0) 19(2.3,0.5) 20(2.3,1) 21(2.3,1.5)
  rrect50% 0.25x0.75 smd: 8(-1.5,-2.3) 9(-1,-2.3) 10(-0.5,-2.3) 11(0,-2.3) 12(0.5,-2.3) 13(1,-2.3) 14(1.5,-2.3) 22(1.5,2.3) 23(1,2.3) 24(0.5,2.3) 25(0,2.3) 26(-0.5,2.3) 27(-1,2.3) 28(-1.5,2.3)
  silkscreen extent -3.42,-2.65 2.65,2.65, body extent -2.5,-2.5 2.5,2.5, height 0.9
R0603 [mm] "Chip Resistor, 2-Leads, Body 1,60x0,80mm, IPC Medium Density"
  rect 0.8x0.9 smd: 1(-0.75,0) 2(0.75,0)
  silkscreen extent -1.5,-0.75 1.5,0.75, body extent -0.77,-0.43 0.78,0.43, height 0.43
SOIC-8#1 [mm] "SOIC, 8-Leads, Body 4,90x3,90mm, Pitch 1,27mm, IPC Medium Density"
  oval 1.45x0.6 smd: 1(-2.725,1.905) 2(-2.725,0.635) 3(-2.725,-0.635) 4(-2.725,-1.905) 5(2.725,-1.905) 6(2.725,-0.635) 7(2.725,0.635) 8(2.725,1.905)
  silkscreen extent -3.81,-2.5 1.6,2.92, body extent -3.06,-2.47 3.06,2.48, height 1.75
SOIC-8#2 [mm] "SOIC, 8-Leads, Body 4,90x3,90mm, Pitch 1,27mm, IPC Medium Density"
  rect 1.5x0.6 smd: 1(-2.725,1.905)
  rrect50% 1.5x0.6 smd: 2(-2.725,0.635) 3(-2.725,-0.635) 4(-2.725,-1.905) 5(2.725,-1.905) 6(2.725,-0.635) 7(2.725,0.635) 8(2.725,1.905)
  silkscreen extent -3.81,-2.5 1.6,2.79, body extent -3.06,-2.47 3.06,2.48, height 1.75
SOT23-3 [mm] "SOT23, 3-Leads, Body 2,92x2,37mm"
  rect 1x0.6 smd: 1(-1.145,0.95) 2(-1.145,-0.95) 3(1.145,0)
  silkscreen extent -2.03,-1.5 0.7,1.9, body extent -1.25,-1.5 1.25,1.5, height 1.1

## Part data
C1: library part c0008, "=Описание", HelpURL=https://www.yageo.com/upload/media/product/products/datasheet/mlcc/UPY-GPHC_X7R_6.3V-to-50V_20.pdf, ID=c0008, Корпус=0603, Наименование=CC0603KRX7R8BB105, Напряжение="25 В", Номинал="1 мк", Номинальное напряжение="25 В", Описание="Конденсатор чип 0603 1 мкФ 25 В ±10 %", Отклонение="±10 %", Производитель="YAGEO Corp.", Рабочие температуры="от -55 °С до +125 °С", Фамилия=Ларионов
C2 C3 C4 C5: library part c0005, "=Описание", HelpURL=https://www.yageo.com/upload/media/product/products/datasheet/mlcc/UPY-GPHC_X7R_6.3V-to-50V_20.pdf, ID=c0005, Корпус=0603, Наименование=CC0603JRX7R9BB104, Напряжение="50 В", Номинал="0,1 мк", Номинальное напряжение="50 В", Описание="Конденсатор чип 0603 0,1 мкФ 50 В ±5 %", Отклонение="±5 %", Производитель="YAGEO Corp.", Рабочие температуры="от -55 °С до +125 °С", Фамилия=Ларионов
DD1: library part dd0002, "=Описание", HelpURL=https://www.silabs.com/interface/usb-bridges/classic/device.cp2102, ID=dd0002, Корпус=QFN-28, Наименование=CP2102-GM, Описание="Преобразователь USB-UART", Производитель="Silicon Laboratories", Фамилия=Кочурин
DD2: library part dd0010, "=Описание", HelpURL=https://www.ti.com/product/SN65HVD1781, ID=dd0010, Корпус=SOIC-8, Наименование=SN65HVD1781D, Описание="Приемопередатчик RS-485", Производитель="Texas Instruments", Фамилия=Кочурин
HL1: library part hl0003, "=Описание", Colour=Желтый, HelpURL=https://www.vishay.com/leds/list/product-83172/, ID=hl0003, Корпус=0603, Наименование=TLMY1000-GS08, Номинальная длина волны="588 нм", Номинальная сила света="7,5 мкд", Номинальное падение напряжения="1,8 В", Номинальный прямой ток="15 мА", Описание="Светодиод чип 0603 желтый", Производитель="Vishay Intertechnology, Inc.", Рабочие температуры="от –40 °С до +100 °С", Рассеиваемая мощность="40 мВт", Фамилия=Ларионов, Цвет=Желтый
L1: library part l0002, "=Описание", HelpURL=https://www.murata.com/en-global/products/productdetail?partno=BLM18PG221SN1%23, ID=l0002, Корпус=0603, Наименование=BLM18PG221SN1D, Описание="Ферритовая бусина 220 Ом ±25 %", Отклонение, 100 Мгц="±25 %", Производитель="Murata Manufacturing Co., Ltd.", Рабочие температуры="от -55 °С до +125 °С", Сопротивление, 100 МГц="220 Ом", Сопротивление при постоянном токе="0,1 Ом", Фамилия=Самарин
R1: library part r0008, "=Описание", HelpURL=https://www.yageo.com/upload/media/product/productsearch/datasheet/rchip/PYu-RC_Group_51_RoHS_L_11.pdf, ID=r0008, Корпус=0603, Наименование=RC0603FR-07220RL, Номинал=220, Номинальное напряжение="75 В", Номинальный ток="1 А", Описание="Резистор чип 0603 220 Ом ±1 % 0,1 Вт", Отклонение="±1 %", Производитель="YAGEO Corp.", Рабочие температуры="от -55 °С до +155 °С", Фамилия=Ларионов
R2: library part r0011, "=Описание", HelpURL=https://www.yageo.com/upload/media/product/productsearch/datasheet/rchip/PYu-RC_Group_51_RoHS_L_11.pdf, ID=r0011, Корпус=0603, Наименование=RC0603FR-074K7L, Номинал="4,7 к", Номинальное напряжение="75 В", Номинальный ток="1 А", Описание="Резистор чип 0603 4,7 кОм ±1 % 0,1 Вт", Отклонение="±1 %", Производитель="YAGEO Corp.", Рабочие температуры="от -55 °С до +155 °С", Фамилия=Ларионов
R3 R4: library part r0012, "=Описание", HelpURL=https://www.yageo.com/upload/media/product/productsearch/datasheet/rchip/PYu-RC_Group_51_RoHS_L_11.pdf, ID=r0012, Корпус=0603, Наименование=RC0603FR-0710KL, Номинал="10 к", Номинальное напряжение="75 В", Номинальный ток="1 А", Описание="Резистор чип 0603 10 кОм ±1 % 0,1 Вт", Отклонение="±1 %", Производитель="YAGEO Corp.", Рабочие температуры="от -55 °С до +155 °С", Фамилия=Самарин
R5: library part r0007, "=Описание", HelpURL=https://www.yageo.com/upload/media/product/productsearch/datasheet/rchip/PYu-RC_Group_51_RoHS_L_11.pdf, ID=r0007, Корпус=0603, Наименование=RC0603FR??07120RL, Номинал=120, Номинальное напряжение="75 В", Номинальный ток="1 А", Описание="Резистор чип 0603 120 Ом ±1 % 0,1 Вт", Отклонение="±1 %", Производитель="YAGEO Corp.", Рабочие температуры="от -55 °С до +155 °С", Фамилия=Самарин
VD1 VD3: library part vd0003, "=Описание", ID=vd0003
  VD1: HelpURL=https://www.vishay.com/product?docid=88740, Корпус=DO-214AC, Максимальное обратное напряжение="30 В", Максимальное прямое напряжение="0,445 В", Максимальный прямой ток="1,5 А", Наименование=SL13-E3/5AT, Описание="Диод Шоттки 30 В 1,5 А", Производитель="Vishay Intertechnology, Inc.", Рабочие температуры="от –55 °С до +125 °С", Фамилия=Ларионов
  VD3: HelpURL=https://www.littelfuse.com/products/tvs-diode-arrays/general-purpose-esd-protection/sm712.aspx, Корпус=SOT23-3, Наименование=SM712-02HTG, Описание="Диодная сборка для подавления помех, -7/12 В", Производитель="Littelfuse, Inc.", Фамилия=Самарин
VD2: library part vd0010, "=Описание", HelpURL=https://www.st.com/content/st_com/en/products/protection-devices/esd-protection/usb-port-protection/usb6b1.html, ID=vd0010, Корпус=SOIC-8, Наименование=USB6B1, Описание="Диодная сборка для подавления помех, от 6 В", Производитель=STMicroelectronics, Фамилия=Ларионов
X1: library part x0001, "=Описание", Contact_1=VBUS, Contact_2=D-, Contact_3=D+, Contact_4=ID, Contact_5=GND, HelpURL=https://www.te.com/global-en/product-2108877-1.html, ID=x0001, Наименование=2108877-1, Описание="Micro USB 2.0 Type B IP68 гнездо", Производитель="TE Connectivity", Фамилия=Ларионов
X2: library part x0015, "=Описание", Contact_1=B, Contact_2=A, Contact_3=GND, Contact_4=GND, Contact_5=GND, Contact_6=GND, HelpURL=http://en.connfly.group/product/xVkr=EusQssAN0gN=Aos=mU+UrVkR9kqEAN0gN9g+WqANB+A, ID=x0015, Наименование=DS1021-2x3SF11-B, Описание="PLS 2x3 pin 2,54 мм вилка прямой", Производитель="Connfly Electronic Co., Ltd.", Фамилия=Самарин

## Free pads (board coordinates)
  round 3 hole 1.6: 2(34.5,4.5) 3(34.5,20)

## Via types
v1: diameter 0.6/0.6/0.6/0.6 (per signal layer), hole 0.3, Top Layer to Bottom Layer, tented top, 382 vias
v2: diameter 0.6/0.6/0.6/0.6 (per signal layer), hole 0.3, Top Layer to Bottom Layer, tented both sides, 130 vias
v3: diameter 0.6, hole 0.3, Top Layer to Bottom Layer, tented both sides, 34 vias

## Nets (pads, with @x,y where several pads share a name; then routed paths per layer and width w, separated by ;. In a path a pad name is that pad's centre, name@x,y a point inside that pad or via, vN(x,y) a via of type N, cw(c..) or ccw(c..) an arc to the next point about the centre after c; other vN are vias at no path point)
5V_IN: VD1.2 X1.1 | length 3.4
  Top Layer w0.5: X1.1 6.6,15.1 VD1.2@8.5,17
+5V: C1.2 C2.1 C5.1 DD1.7 DD1.8 DD2.8 L1.2 R1.2 R2.2 R3.2 | length 6.3
  Top Layer w0.15: v3(13.5,22.5) 13.5,21.725 R1.2@13.725,21.5 ; 19,7.5 DD1.8@20,7.5 ; 20.573,8.4 DD1.7@20.9,8.4 ; v3(25.5,16) 26.7,16 C5.1 29.07,15.7 DD2.8
  Top Layer w0.254: DD1.7@20.9,8.4 DD1.7@20.9,8.6
  other v3: 28.5,2.5 29.5,2.5 18,7 17.5,7.5 18.5,7.5 18,8 22,13 23,13 22.5,13.5 22,14 23,14 22.5,14.5 22,15 23,15 26,15.5
D: DD1.26 DD2.4 | length 10.8
  Top Layer w0.15: DD1.26@24.8,6.5 v3(25.8,6.5) ; v3(32.9,9) 32.9,10.27 DD2.4
  Bottom Layer w0.15: v3(25.8,6.5) 27.6,6.5 30.6,9.5 32.4,9.5 v3(32.9,9)
D_IN_N: DD1.5 VD2.7 | length 9.4
  Top Layer w0.143: VD2.7 17.792,12.568 18.932,12.568 v3(19,12.5) ; DD1.5@21.9,8.4 21.9,8.725 22.188,9.013 22.188,9.413 v3(22.275,9.5)
  Bottom Layer w0.143: v3(19,12.5) 18.162,11.662 18.162,10.534 18.534,10.162 21.5,10.162 22.162,9.5 v3(22.275,9.5)
D_IN_P: DD1.4 VD2.6 | length 8.7
  Top Layer w0.188: VD2.6 17.792,11.432 18.932,11.432 v3(19,11.5) ; DD1.4@22.4,8.4 22.4,8.725 22.921,9.246 22.921,9.421 v3(23,9.5)
  Bottom Layer w0.188: v3(19,11.5) 18.5,11 18.5,10.61 18.61,10.5 22.009,10.5 23,9.509 v3(23,9.5)
GND: C1.1 C2.2 C3.2 C4.2 C5.2 DD1.0 DD1.3 DD2.5 HL1.1 pad.2 pad.3 R4.1 VD2.4 VD2.5 VD3.3 X1.5 X1.TP1 X2.3 X2.4 X2.5 X2.6 | length 10.5
  Top Layer w0.15: 12,4.5 C4.2 ; v1(12,7.5) C1.1 ; 13,6 C2.2 ; HL1.1@13.85,24 HL1.1@14.129,23.721 ; v3(22.4,6) 22.9,6.5 DD1.3@22.9,8.4 ; C5.2@27,14.225 C5.2
  other v1: 2,1.5 2,1.5 2,1.5 4,1.5 4,1.5 4,1.5 6,1.5 6,1.5 6,1.5 8,1.5 8,1.5 8,1.5 10,1.5 10,1.5 10,1.5 12,1.5 12,1.5 12,1.5 14,1.5 14,1.5 14,1.5 16,1.5 16,1.5 16,1.5 18,1.5 18,1.5 18,1.5 20,1.5 20,1.5 20,1.5 22,1.5 22,1.5 22,1.5 24,1.5 24,1.5 24,1.5 26,1.5 26,1.5 26,1.5 28,1.5 28,1.5 28,1.5 30,1.5 32,1.5 32,1.5 32,1.5 34,1.5 34,1.5 34,1.5 2,3.5 2,3.5 2,3.5 4,3.5 4,3.5 4,3.5 6,3.5 6,3.5 6,3.5 8,3.5 8,3.5 8,3.5 10,3.5 10,3.5 10,3.5 12,3.5 12,3.5 12,3.5 18,3.5 18,3.5 18,3.5 20,3.5 20,3.5 20,3.5 26,3.5 26,3.5 26,3.5 32,3.5 4,5.5 4,5.5 4,5.5 6,5.5 6,5.5 6,5.5 8,5.5 8,5.5 8,5.5 10,5.5 10,5.5 10,5.5 12,5.5 12,5.5 12,5.5 30,5.5 32,5.5 8,7.5 8,7.5 8,7.5 10,7.5 10,7.5 10,7.5 12,7.5 12,7.5 26,7.5 26,7.5 26,7.5 32,7.5 32,7.5 32,7.5 34,7.5 34,7.5 34,7.5 8,9.5 8,9.5 8,9.5 10,9.5 10,9.5 10,9.5 14,9.5 14,9.5 14,9.5 24,9.5 24,9.5 24,9.5 26,9.5 26,9.5 26,9.5 28,9.5 28,9.5 28,9.5 34,9.5 34,9.5 34,9.5 6,11.5 6,11.5 6,11.5 8,11.5 8,11.5 8,11.5 14,11.5 14,11.5 14,11.5 16,11.5 16,11.5 16,11.5 20,11.5 20,11.5 20,11.5 22,11.5 22,11.5 22,11.5 24,11.5 24,11.5 24,11.5 26,11.5 26,11.5 26,11.5 28,11.5 28,11.5 28,11.5 30,11.5 30,11.5 30,11.5 32,11.5 32,11.5 32,11.5 34,11.5 34,11.5 34,11.5 10,13.5 10,13.5 10,13.5 14,13.5 14,13.5 14,13.5 16,13.5 16,13.5 16,13.5 30,13.5 30,13.5 30,13.5 32,13.5 32,13.5 32,13.5 34,13.5 34,13.5 34,13.5 10,15.5 10,15.5 10,15.5 14,15.5 14,15.5 14,15.5 16,15.5 16,15.5 16,15.5 18,15.5 18,15.5 18,15.5 20,15.5 20,15.5 20,15.5 24,15.5 24,15.5 24,15.5 34,15.5 34,15.5 34,15.5 14,17.5 14,17.5 14,17.5 16,17.5 16,17.5 16,17.5 18,17.5 18,17.5 18,17.5 20,17.5 20,17.5 20,17.5 22,17.5 22,17.5 22,17.5 24,17.5 24,17.5 24,17.5 26,17.5 26,17.5 26,17.5 28,17.5 28,17.5 28,17.5 34,17.5 34,17.5 34,17.5 4,19.5 4,19.5 4,19.5 6,19.5 6,19.5 6,19.5 8,19.5 8,19.5 8,19.5 10,19.5 10,19.5 10,19.5 12,19.5 12,19.5 12,19.5 14,19.5 14,19.5 14,19.5 16,19.5 16,19.5 16,19.5 18,19.5 18,19.5 18,19.5 20,19.5 20,19.5 20,19.5 22,19.5 22,19.5 22,19.5 2,21.5 2,21.5 2,21.5 4,21.5 4,21.5 4,21.5 6,21.5 6,21.5 6,21.5 8,21.5 8,21.5 8,21.5 10,21.5 10,21.5 10,21.5 12,21.5 12,21.5 12,21.5 18,21.5 18,21.5 18,21.5 20,21.5 20,21.5 20,21.5 22,21.5 22,21.5 22,21.5 30,21.5 30,21.5 30,21.5 32,21.5 32,21.5 32,21.5 2,23.5 2,23.5 2,23.5 4,23.5 4,23.5 4,23.5 6,23.5 6,23.5 6,23.5 8,23.5 8,23.5 8,23.5 10,23.5 10,23.5 10,23.5 12,23.5 12,23.5 12,23.5 18,23.5 18,23.5 18,23.5 20,23.5 20,23.5 20,23.5 22,23.5 22,23.5 22,23.5 30,23.5 30,23.5 30,23.5 32,23.5 32,23.5 32,23.5 34,23.5 34,23.5 34,23.5 2,25.5 2,25.5 2,25.5 4,25.5 4,25.5 4,25.5 6,25.5 6,25.5 6,25.5 8,25.5 8,25.5 8,25.5 10,25.5 10,25.5 10,25.5 12,25.5 12,25.5 12,25.5 14,25.5 14,25.5 14,25.5 16,25.5 16,25.5 16,25.5 18,25.5 18,25.5 18,25.5 20,25.5 20,25.5 20,25.5 22,25.5 22,25.5 22,25.5 24,25.5 24,25.5 24,25.5 26,25.5 26,25.5 26,25.5 30,25.5 30,25.5 30,25.5 32,25.5 32,25.5 32,25.5 34,25.5 34,25.5 34,25.5
  other v2: 2,1.5 4,1.5 6,1.5 8,1.5 10,1.5 12,1.5 14,1.5 16,1.5 18,1.5 20,1.5 22,1.5 24,1.5 26,1.5 28,1.5 30,1.5 32,1.5 34,1.5 2,3.5 4,3.5 6,3.5 8,3.5 10,3.5 12,3.5 18,3.5 20,3.5 26,3.5 32,3.5 4,5.5 6,5.5 8,5.5 10,5.5 12,5.5 30,5.5 32,5.5 8,7.5 10,7.5 12,7.5 26,7.5 32,7.5 34,7.5 8,9.5 10,9.5 14,9.5 24,9.5 26,9.5 28,9.5 34,9.5 6,11.5 8,11.5 14,11.5 16,11.5 20,11.5 22,11.5 24,11.5 26,11.5 28,11.5 30,11.5 32,11.5 34,11.5 10,13.5 14,13.5 16,13.5 30,13.5 32,13.5 34,13.5 10,15.5 14,15.5 16,15.5 18,15.5 20,15.5 24,15.5 34,15.5 14,17.5 16,17.5 18,17.5 20,17.5 22,17.5 24,17.5 26,17.5 28,17.5 34,17.5 4,19.5 6,19.5 8,19.5 10,19.5 12,19.5 14,19.5 16,19.5 18,19.5 20,19.5 22,19.5 2,21.5 4,21.5 6,21.5 8,21.5 10,21.5 12,21.5 18,21.5 20,21.5 22,21.5 30,21.5 32,21.5 2,23.5 4,23.5 6,23.5 8,23.5 10,23.5 12,23.5 18,23.5 20,23.5 22,23.5 30,23.5 32,23.5 34,23.5 2,25.5 4,25.5 6,25.5 8,25.5 10,25.5 12,25.5 14,25.5 16,25.5 18,25.5 20,25.5 22,25.5 24,25.5 26,25.5 30,25.5 32,25.5 34,25.5
  other v3: 21.2,4.8 22.4,4.8 23.6,4.8 21.2,6 23.6,6 21.2,7.2 22.4,7.2 23.6,7.2
NetC3_1: C3.1 DD1.6 | length 1.4
  Top Layer w0.254: DD1.6@21.4,8.4 C3.1@21.4,9.8
NetHL1_2: HL1.2 R1.1 | length 2.6
  Top Layer w0.15: R1.1@15.275,21.5 15.275,23.775 HL1.2@15.5,24
NetL1_1: L1.1 VD2.8 | length 1.7
  Top Layer w0.5: VD2.8 L1.1@19.405,13.905
NetVD1_1: VD1.1 VD2.1 | length 3
  Top Layer w0.5: VD2.1@12.2,13.98 VD1.1@12.2,17
R: DD1.25 DD2.1 R3.1 | length 9.1
  Top Layer w0.15: DD1.25@24.8,6 28.25,6 ; R3.1@29,5.275 28.975,5.275 28.25,6 ; DD2.1 29.095,6.845 28.25,6
RS485_N: DD2.7 R5.2 VD3.1 X2.1 | length 9.8
  Top Layer w0.188: X2.1 28.356,19.856 28.356,19.991 28.466,20.101 30.23,20.101 30.831,19.5 30.831,18.728 ; VD3.1 30.1,18.934 30.306,18.728 30.831,18.728 ; DD2.7 30.365,16.038 30.555,16.229 30.709,16.229 30.831,16.351 30.831,17.043 30.721,17.153 30.556,17.153 30.225,17.485 30.225,17.5 30.225,17.515 30.556,17.847 30.721,17.847 30.831,17.957 30.831,18.728
RS485_P: DD2.6 R5.1 VD3.2 X2.2 | length 10.7
  Top Layer w0.188: X2.2 27.828,21.212 27.828,20.596 27.985,20.439 30.37,20.439 31.169,19.64 31.169,18.728 ; DD2.6 31.635,16.038 31.445,16.229 31.291,16.229 31.169,16.351 31.169,17.043 31.279,17.153 31.444,17.153 31.775,17.485 31.775,17.5 31.775,17.515 31.444,17.847 31.279,17.847 31.169,17.957 31.169,18.728 ; VD3.2 32,18.934 31.794,18.728 31.169,18.728
RST: C4.1 DD1.9 R2.1 | length 5.2
  Top Layer w0.15: C4.1 18,4.5 19,5.5 19,6.5 19.5,7 DD1.9@19.775,7
RTS: DD1.24 DD2.2 DD2.3 R4.2 | length 11.4
  Top Layer w0.15: DD1.24@24.8,5.5 v3(25.788,5.5) 26.775,5.5 R4.2@27,5.275 ; DD2.2 30.9,9.74 ; v3(30.9,9) 30.9,9.74 ; DD2.3 31.635,10.133 31.427,9.925 31.085,9.925 30.9,9.74
  Bottom Layer w0.15: v3(25.788,5.5) 27.4,5.5 v3(30.9,9)
USB_D_IN_N: VD2.2 X1.2 | length 7.6
  Top Layer w0.188: X1.2 6.221,14.5 6.302,14.419 7.059,14.419 9.309,12.169 11.649,12.169 11.771,12.291 11.771,12.445 11.962,12.635 VD2.2
USB_D_IN_P: VD2.3 X1.3 | length 7.6
  Top Layer w0.188: X1.3 6.221,14 6.302,14.081 6.919,14.081 9.169,11.831 11.649,11.831 11.771,11.709 11.771,11.555 11.962,11.365 VD2.3
pads on no net: DD1.1 DD1.2 DD1.10 DD1.11 DD1.12 DD1.13 DD1.14 DD1.15 DD1.16 DD1.17 DD1.18 DD1.19 DD1.20 DD1.21 DD1.22 DD1.23 DD1.27 DD1.28 X1.4
copper on no net: | length 1
  Top Layer w0.254: 14.435,6 14.8,6 ; 14.5,4.5 14.8,4.5 ; 14.5,7.5 14.8,7.5

## Polygon pours and split planes (outlines as drawn)
GND on Top Layer "GND_L01_P030" (solid, remove dead copper, pour order 30): -0.025,27.204 36.975,27.204 36.975,0 -0.025,0
+5V on Top Layer "+5V_L01_P028" (solid, remove dead copper, pour order 28): 18,5.5 16.5,5.5 15.5,6.5 15.5,8.5 16,9 20.5,9 21,8.5 21,8 20.5,7.5 19,7.5 19,7 18.5,6.5 18.5,6
+5V on Top Layer "+5V_L01_P026" (solid, remove dead copper, pour order 26): 28,3.5 28.225,3.725 28.5,4 29.5,4 30,3.5 30,2.5 29.5,2 28.5,2 28,2.5
+5V on Top Layer "+5V_L01_P024" (solid, remove dead copper, pour order 24): 25,16 25.5,16.5 26,16.5 26.5,16 26.7,16 26.7,15.2 26.5,15 25.5,15 25,15.5
no net on Top Layer "NONET_L01_P008" (solid, remove dead copper, pour order 8): 23.5,13.5
no net on Top Layer "NONET_L01_P006" (solid, remove dead copper, pour order 6): 24.5,13.5
no net on Top Layer "NONET_L01_P004" (solid, remove dead copper, pour order 4): 24.5,13.5
GND on Bottom Layer "GND_L04_P016" (solid, remove dead copper, pour order 16): 0,27 37,27 37,0 0,0
GND on Signal Layer 2 "GND_L03_P018" (solid, remove dead copper, pour order 18): 0,27 37,27 37,0 0,0
+5V on Signal Layer 1 "+5V_L02_P020" (solid, remove dead copper, pour order 20): 0,27 37,27 37,0 0,0

## Other copper
Top Layer:
  region net +5V: 20.98,14 20.98,14.98 21.5,15.5 23,15.5 23.5,15 23.5,13 23,12.5 21.5,12.5 21,13

## Silkscreen, mask and mechanical layers (free items; w line width, h text height)
Top Overlay:
  text "USB/RS485" at -0.6,23.65 h2
  text "PWR" at 16.5,23.45 h1.2
  text ".designation" at 0,0.5 h2
Bottom Overlay:
  text ".pcb_dec_number" at 16,0.5 h2
Board:
  lines w0.1: 0,0 9.25,0 27.75,0 37,0 37,27 0,27 0,0
Assembly Notes (Mech5):
  text "'.title'" at 0,-2 h2
  text "'.project'_'.pcb_dec_number'['.Pcb_File_Name_No_Path']" at 0,-4.5 h2